# EAGLE board tubeboardv2 (EAGLE 9.4.2)
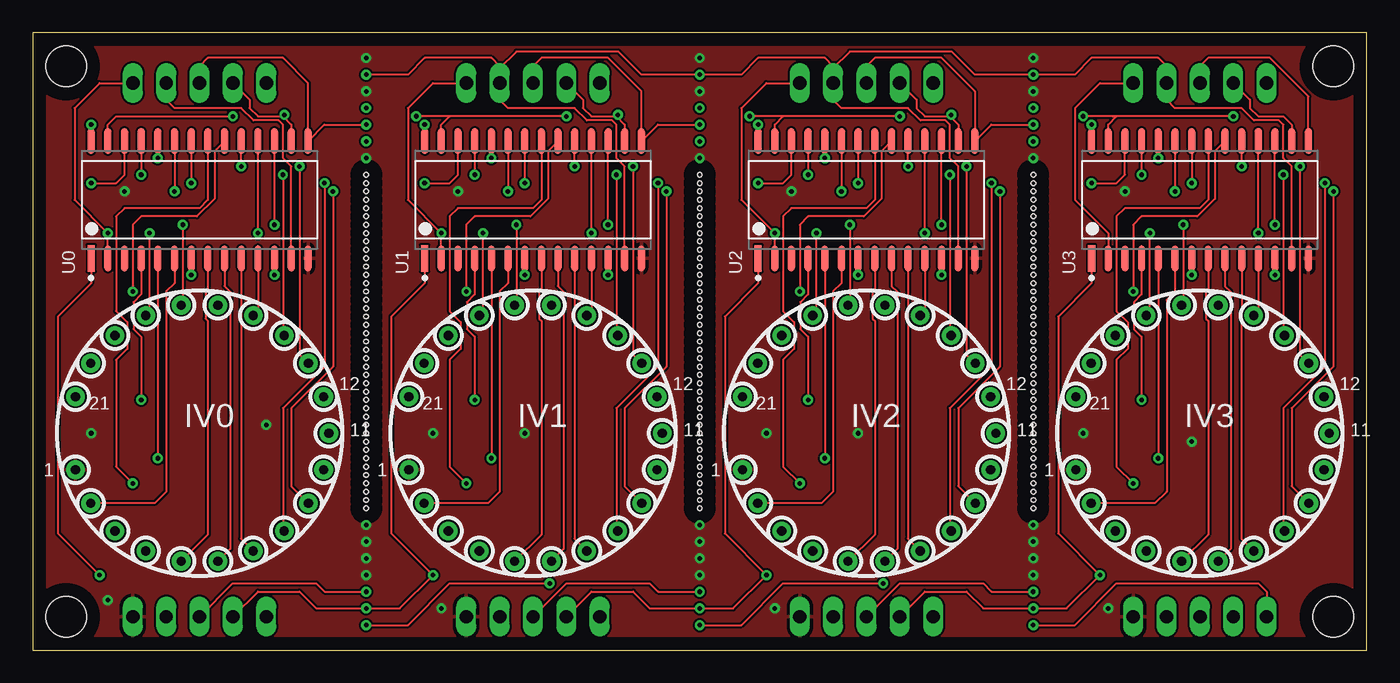
[diagram p0: board, top side]
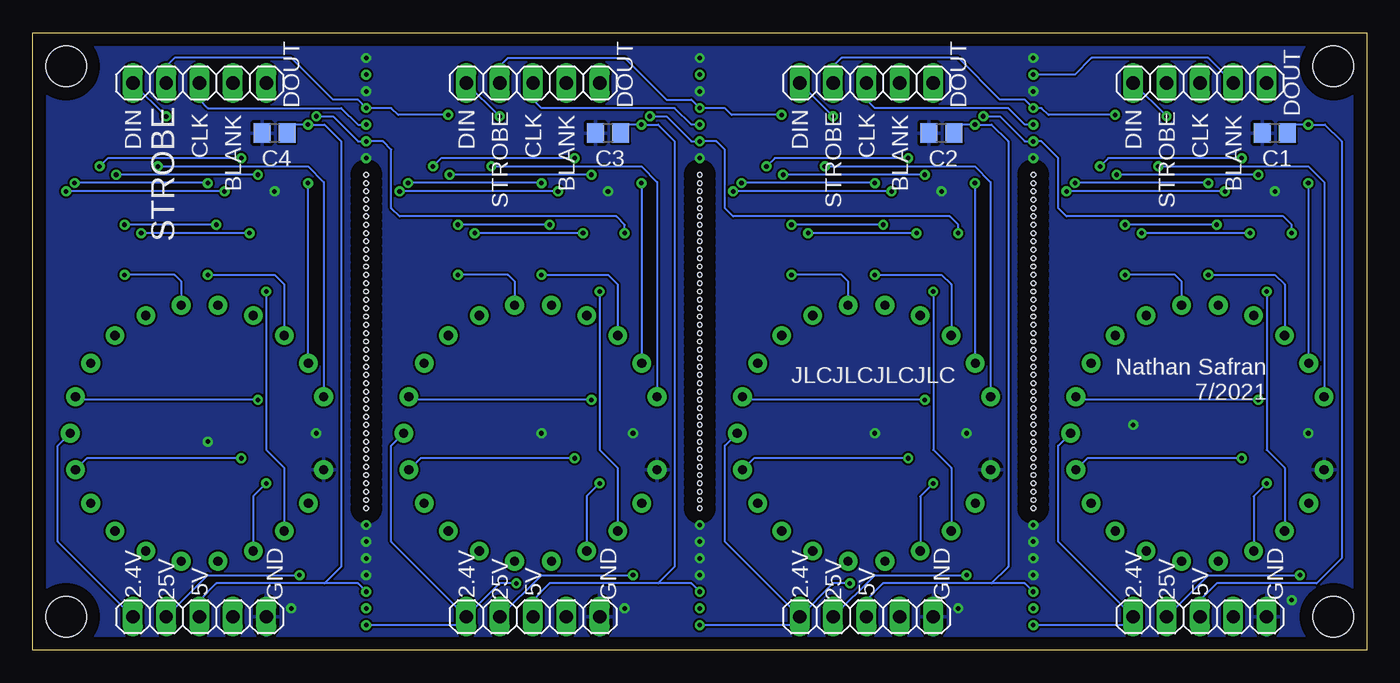
[diagram p1: board, bottom side, seen from below]

Size 101.6 x 47 mm. Coordinates in mm from the lower left corner, seen from the top.
Outline: 0,0 101.6,0 101.6,46.99 0,47 0,0
Copper layers (1*16): Top 0.035mm / dielectric 1.5mm / Bottom 0.035mm
Design rules "default": minimum track width 6mil, minimum drill 0.35mm, track to track 6mil, track to pad 6mil, pad to pad 6mil, via to via 6mil, smd to smd 6mil, copper to edge 40mil, drill to drill 6mil, minimum pad ring 10mil, minimum via ring 8mil, stop-mask expansion 4mil, vias tented up to drill 0mil, thermal gap 10mil
Holes 3.1 mm at 2.54,44.45 2.54,2.54 99.06,2.54 99.06,44.45
Holes 0.35 mm at 25.4,36.2 25.4,35.56 25.4,34.92 25.4,34.29 25.4,33.66 25.4,33.02 25.4,32.38 25.4,31.75 25.4,31.11 25.4,30.48 25.4,29.84 25.4,28.57 25.4,29.21 25.4,27.94 25.4,27.3 25.4,26.67 25.4,26.04 25.4,25.4 25.4,24.77 25.4,24.13 25.4,23.5 25.4,22.86 25.4,22.23 25.4,21.59 25.4,20.95 25.4,20.32 25.4,19.68 25.4,19.05 25.4,18.41 25.4,17.78 25.4,17.14 25.4,16.51 25.4,15.88 25.4,15.24 25.4,14.61 25.4,13.97 25.4,13.34 25.4,12.7 25.4,12.06 25.4,11.43 25.4,10.79 50.8,36.2 50.8,35.56 50.8,34.92 50.8,34.29 50.8,33.66 50.8,33.02 50.8,32.38 50.8,31.75 50.8,31.11 50.8,30.48 50.8,29.84 50.8,28.57 50.8,29.21 50.8,27.94 50.8,27.3 50.8,26.67 50.8,26.04 50.8,25.4 50.8,24.77 50.8,24.13 50.8,23.5 50.8,22.86 50.8,22.23 50.8,21.59 50.8,20.95 50.8,20.32 50.8,19.68 50.8,19.05 50.8,18.41 50.8,17.78 50.8,17.14 50.8,16.51 50.8,15.88 50.8,15.24 50.8,14.61 50.8,13.97 50.8,13.34 50.8,12.7 50.8,12.06 50.8,11.43 50.8,10.79 76.2,36.2 76.2,35.56 76.2,34.92 76.2,34.29 76.2,33.66 76.2,33.02 76.2,32.38 76.2,31.75 76.2,31.11 76.2,30.48 76.2,29.84 76.2,28.57 76.2,29.21 76.2,27.94 76.2,27.3 76.2,26.67 76.2,26.04 76.2,25.4 76.2,24.77 76.2,24.13 76.2,23.5 76.2,22.86 76.2,22.23 76.2,21.59 76.2,20.95 76.2,20.32 76.2,19.68 76.2,19.05 76.2,18.41 76.2,17.78 76.2,17.14 76.2,16.51 76.2,15.88 76.2,15.24 76.2,14.61 76.2,13.97 76.2,13.34 76.2,12.7 76.2,12.06 76.2,11.43 76.2,10.79

## Footprints (pad centres in the part's own frame; a part is rotated, then mirrored left to right if it is on the bottom)
C0805 = smd 1.3 x 1.5: 1 -0.95,0; 2 0.95,0
NIXIE-22 = drill 0.7 pad 1.422: 1 -9.451,-2.775; 2 -8.287,-5.325; 3 -6.45,-7.444; 4 -4.092,-8.96; 5 -1.402,-9.75; 6 1.402,-9.75; 7 4.092,-8.96; 8 6.45,-7.444; 9 8.287,-5.325; 10 9.451,-2.775; 11 9.85,0; 12 9.451,2.775; 13 8.287,5.325; 14 6.45,7.444; 15 4.092,8.96; 16 1.402,9.75; 17 -1.402,9.75; 18 -4.092,8.96; 19 -6.45,7.444; 20 -8.287,5.325; 21 -9.451,2.775
1X05 = drill 1.016 long: 1 -5.08,0; 2 -2.54,0; 3 0,0; 4 2.54,0; 5 5.08,0
MICROCHIP_HV5812WG-G_0 = smd 2.003 x 0.542: 1 -4.465,8.255; 2 -4.465,6.985; 3 -4.465,5.715; 4 -4.465,4.445; 5 -4.465,3.175; 6 -4.465,1.905; 7 -4.465,0.635; 8 -4.465,-0.635; 9 -4.465,-1.905; 10 -4.465,-3.175; 11 -4.465,-4.445; 12 -4.465,-5.715; 13 -4.465,-6.985; 14 -4.465,-8.255; 15 4.465,-8.255; 16 4.465,-6.985; 17 4.465,-5.715; 18 4.465,-4.445; 19 4.465,-3.175; 20 4.465,-1.905; 21 4.465,-0.635; 22 4.465,0.635; 23 4.465,1.905; 24 4.465,3.175; 25 4.465,4.445; 26 4.465,5.715; 27 4.465,6.985; 28 4.465,8.255

## Placement (x,y rotation side)
C1  [C0805]  6.99,39.37 180 bottom
C2  [C0805]  32.38,39.37 180 bottom
C3  [C0805]  57.78,39.37 180 bottom
C4  [C0805]  83.19,39.37 180 bottom
IV0  IV17  [NIXIE-22]  12.7,16.51 0 top
IV1  IV17  [NIXIE-22]  38.1,16.51 0 top
IV2  IV17  [NIXIE-22]  63.5,16.51 0 top
IV3  IV17  [NIXIE-22]  88.9,16.51 0 top
JP1  [1X05]  12.7,2.54 0 bottom
JP2  [1X05]  12.7,43.18 0 bottom
JP3  [1X05]  38.1,2.54 0 bottom
JP4  [1X05]  38.1,43.18 0 bottom
JP5  [1X05]  63.5,2.54 0 bottom
JP6  [1X05]  63.5,43.18 0 bottom
JP7  [1X05]  88.9,2.54 0 bottom
JP8  [1X05]  88.9,43.18 0 bottom
U0  MICROCHIP_HV5812WG-GMICROCHIP_HV5812WG-G_0_0  [MICROCHIP_HV5812WG-G_0]  12.7,34.29 90 top
U1  MICROCHIP_HV5812WG-GMICROCHIP_HV5812WG-G_0_0  [MICROCHIP_HV5812WG-G_0]  38.1,34.29 90 top
U2  MICROCHIP_HV5812WG-GMICROCHIP_HV5812WG-G_0_0  [MICROCHIP_HV5812WG-G_0]  63.5,34.29 90 top
U3  MICROCHIP_HV5812WG-GMICROCHIP_HV5812WG-G_0_0  [MICROCHIP_HV5812WG-G_0]  88.9,34.29 90 top

## Library data of the parts
C1-C4 = rcl; SPICEPREFIX: C
IV0 IV1-IV3 = XXXXXXtube supl
JP1-JP8 = pinhead
U0 U1-U3 = Microchip - HV5812WG-G; CENTROID_NOT_SPECIFIED: No; DATASHEET: http://www.mouser.com/ds/2/268/HV5812%20C072413-767325.pdf; DIGIKEY_DESCRIPTION: IC DISPLAY DVR 20CH 80V 28SOI; DIGIKEY_PART_NUMBER: HV5812WG-GCT-ND; IPC_LAND_PATTERN_NAME: SOIC127P1030X240-28; LEAD_FREE: yes; MF: Microchip; MOUSER_PART_NUMBER: 689-HV5812WG-G; MPN: HV5812WG-G; PACKAGE: SOIC28; PREFIX: U; ROHS: yes; TEMPERATURE_RANGE_HIGH: +125°C; TEMPERATURE_RANGE_LOW: -40°C

## Nets
+5V: C1.1 C2.1 C3.1 C4.1 JP1.3 JP3.3 JP5.3 JP7.3 U0.28 U1.28 U2.28 U3.28
BLANK: JP2.4 JP4.4 JP6.4 JP8.4 U0.13 U1.13 U2.13 U3.13
CLOCK: JP2.3 JP4.3 JP6.3 JP8.3 U0.15 U1.15 U2.15 U3.15
DATA_IN: JP2.1 U0.27
DATA_OUT0_TO_1: JP2.5 JP4.1 U0.2 U1.27
DATA_OUT1_TO_2: JP4.5 JP6.1 U1.2 U2.27
DATA_OUT2_TO_3: JP6.5 JP8.1 U2.2 U3.27
DATA_OUT3_TO_4: JP8.5 U3.2
GND: C1.2 C2.2 C3.2 C4.2 IV0.1 IV1.1 IV2.1 IV3.1 JP1.5 JP3.5 JP5.5 JP7.5 U0.14 U1.14 U2.14 U3.14
N$1: IV0.20 U0.26
N$2: IV0.14 U0.25
N$3: IV0.13 U0.24
N$4: IV0.9 U0.23
N$5: IV0.8 U0.22
N$6: IV0.4 U0.21
N$7: IV0.3 U0.20
N$8: IV0.21 U0.19
N$9: IV0.18 U0.18
N$10: IV0.17 U0.17
N$11: IV0.16 U0.12
N$12: IV0.15 U0.11
N$13: IV0.7 U0.10
N$14: IV0.6 U0.9
N$15: IV0.5 U0.8
N$16: IV0.19 U0.7
N$17: IV0.2 U0.6
N$18: IV0.10 U0.5
N$19: IV0.12 U0.4
N$20: IV1.20 U1.26
N$21: IV1.14 U1.25
N$22: IV1.13 U1.24
N$23: IV1.9 U1.23
N$24: IV1.8 U1.22
N$25: IV1.4 U1.21
N$26: IV1.3 U1.20
N$27: IV1.21 U1.19
N$28: IV1.18 U1.18
N$29: IV1.17 U1.17
N$30: IV1.16 U1.12
N$31: IV1.15 U1.11
N$32: IV1.7 U1.10
N$33: IV1.6 U1.9
N$34: IV1.5 U1.8
N$35: IV1.19 U1.7
N$36: IV1.2 U1.6
N$37: IV1.10 U1.5
N$38: IV1.12 U1.4
N$39: IV2.20 U2.26
N$40: IV2.14 U2.25
N$41: IV2.13 U2.24
N$42: IV2.9 U2.23
N$43: IV2.8 U2.22
N$44: IV2.4 U2.21
N$45: IV2.3 U2.20
N$46: IV2.21 U2.19
N$47: IV2.18 U2.18
N$48: IV2.17 U2.17
N$49: IV2.16 U2.12
N$50: IV2.15 U2.11
N$51: IV2.7 U2.10
N$52: IV2.6 U2.9
N$53: IV2.5 U2.8
N$54: IV2.19 U2.7
N$55: IV2.2 U2.6
N$56: IV2.10 U2.5
N$57: IV2.12 U2.4
N$58: IV3.20 U3.26
N$59: IV3.14 U3.25
N$60: IV3.13 U3.24
N$61: IV3.9 U3.23
N$62: IV3.8 U3.22
N$63: IV3.4 U3.21
N$64: IV3.3 U3.20
N$65: IV3.21 U3.19
N$66: IV3.18 U3.18
N$67: IV3.17 U3.17
N$68: IV3.16 U3.12
N$69: IV3.15 U3.11
N$70: IV3.7 U3.10
N$71: IV3.6 U3.9
N$72: IV3.5 U3.8
N$73: IV3.19 U3.7
N$74: IV3.2 U3.6
N$75: IV3.10 U3.5
N$76: IV3.12 U3.4
STROBE: JP2.2 JP4.2 JP6.2 JP8.2 U0.16 U1.16 U2.16 U3.16
VEE: IV0.11 IV1.11 IV2.11 IV3.11 JP1.1 JP3.1 JP5.1 JP7.1
VPP: JP1.2 JP3.2 JP5.2 JP7.2 U0.1 U1.1 U2.1 U3.1

## Tracks (layer width: path | path; a pad name or v marks a point on that pad's centre or on a via)
+5V  (via drill 0.35)
  Top 0.152: U0.28 v4.45,40.01 | U1.28 v29.84,40.01 | U2.28 v55.24,40.01 | U3.28 v80.64,40.01 | JP1.3 15.24,5.08 21.59,5.08 22.23,4.45 v25.4,4.45 | JP3.3 40.64,5.08 46.99,5.08 47.62,4.45 v50.8,4.45 | JP5.3 66.04,5.08 72.39,5.08 73.03,4.45 v76.2,4.45
  Bottom 0.152: C1.1 5.4,40.01 v4.45,40.01 3.17,40.01 1.91,38.73 1.91,6.99 3.81,5.08 11.43,5.08 12.7,3.81 JP1.3 | C2.1 30.8,40.01 v29.84,40.01 28.57,40.01 27.3,38.73 27.3,6.35 28.57,5.08 | 28.57,5.08 36.83,5.08 38.1,3.81 JP3.3 | C3.1 56.2,40.01 v55.24,40.01 53.98,40.01 52.7,38.73 52.7,6.35 53.98,5.08 | 53.98,5.08 62.23,5.08 63.5,3.81 JP5.3 | C4.1 81.6,40.01 v80.64,40.01 79.38,40.01 78.11,38.73 78.11,6.35 79.38,5.08 | 79.38,5.08 87.63,5.08 88.9,3.81 JP7.3 | v25.4,4.45 26.04,5.08 28.57,5.08 | v50.8,4.45 51.44,5.08 53.98,5.08 | v76.2,4.45 76.83,5.08 79.38,5.08
BLANK  (via drill 0.35)
  Top 0.152: U3.13 95.89,36.83 95.25,37.47 95.25,40.01 94.92,40.34 93.02,40.34 92.08,41.27 87,41.27 86.36,41.91 JP8.4 86.36,44.45 85.72,45.09 80.64,45.09 79.38,43.81 v76.2,43.81 71.75,43.81 70,45.57 62.23,45.57 60.96,44.3 | U2.13 70.48,36.83 69.85,37.47 69.85,40.01 69.52,40.34 67.61,40.34 66.67,41.27 61.59,41.27 60.96,41.91 JP6.4 60.96,44.3 | U1.13 45.09,36.83 44.45,37.47 44.45,40.01 44.12,40.34 42.22,40.34 41.27,41.27 36.2,41.27 35.56,41.91 JP4.4 | U0.13 19.68,36.83 19.05,37.47 19.05,40.01 18.72,40.34 16.82,40.34 15.88,41.27 10.79,41.27 10.16,41.91 JP2.4 | JP4.4 35.56,44.45 34.92,45.09 29.84,45.09 28.57,43.81 v25.4,43.81 | 60.96,44.3 60.96,44.45 60.33,45.09 55.24,45.09 53.98,43.81 v50.8,43.81 46.35,43.81 44.6,45.57 36.83,45.57 35.56,44.3 JP4.4
  Bottom 0.152: JP2.4 12.06,45.09 20.95,45.09 22.23,43.81 v25.4,43.81
CLOCK  (via drill 0.35)
  Top 0.152: JP2.3 12.7,44.45 13.34,45.09 19.05,45.09 20.95,43.18 U0.15 22.2,40.01 v25.4,40.01 | JP4.3 38.1,44.45 38.73,45.09 43.81,45.09 46.35,42.55 U1.15 47.6,40.01 v50.8,40.01 | JP6.3 63.5,44.45 64.14,45.09 69.22,45.09 71.75,42.55 U2.15 73,40.01 v76.2,40.01 | JP8.3 88.9,44.45 89.53,45.09 94.24,45.09 97.16,42.17 U3.15
  Bottom 0.152: v25.4,40.01 26.04,40.01 27.3,41.27 37.47,41.27 38.1,41.91 JP4.3 | v50.8,40.01 51.44,40.01 52.7,41.27 62.87,41.27 63.5,41.91 JP6.3 | JP8.3 88.9,41.91 88.27,41.27 78.11,41.27 76.83,40.01 v76.2,40.01
DATA_IN  (via drill 0.35)
  Top 0.152: U0.27 5.71,40.01 6.35,40.64 v15.24,40.64
  Bottom 0.152: v15.24,40.64 JP2.1
DATA_OUT0_TO_1  (via drill 0.35)
  Top 0.152: U0.2 v5.71,31.75 3.17,34.29 3.17,41.27 5.08,43.18 JP2.5 | U1.27 31.11,40.01 31.75,40.64 | v40.64,40.64 31.75,40.64 | v29.2,40.65 v29.21,40.64 31.75,40.64
  Bottom 0.152: v40.64,40.64 JP4.1 | v5.71,31.75 5.71,32.38 6.35,33.02 22.86,33.02 23.5,33.66 23.5,37.47 24.77,38.73 v25.4,38.73 26.04,38.73 27.94,40.64 v29.2,40.64 v29.2,40.65
DATA_OUT1_TO_2  (via drill 0.35)
  Top 0.152: U1.2 v31.11,31.75 28.57,34.29 28.57,41.27 30.48,43.18 JP4.5 | U2.27 56.52,40.01 57.15,40.64 | v66.04,40.64 57.15,40.64 | 57.15,40.64 57.14,40.65 | 57.15,40.64 v54.61,40.64 v54.6,40.65
  Bottom 0.152: v66.04,40.64 JP6.1 | v31.11,31.75 31.11,32.38 31.75,33.02 48.26,33.02 48.9,33.66 48.9,38.1 49.53,38.73 v50.8,38.73 51.44,38.73 53.34,40.64 v54.59,40.64 v54.6,40.65
DATA_OUT2_TO_3  (via drill 0.35)
  Top 0.152: U2.2 v56.52,31.75 53.98,34.29 53.98,41.27 55.88,43.18 JP6.5 | U3.27 81.92,40.01 82.55,40.64 | v91.44,40.64 82.55,40.64 | 82.24,40.64 82.55,40.64 | 82.55,40.64 82.54,40.65 v80,40.65
  Bottom 0.152: v91.44,40.64 JP8.1 | v56.52,31.75 56.52,32.38 57.15,33.02 73.66,33.02 74.3,33.66 74.3,38.1 74.93,38.73 v76.2,38.73 76.83,38.73 78.74,40.64 v80,40.64 v80,40.65
DATA_OUT3_TO_4
  Top 0.152: U3.2 81.92,31.75 79.38,34.29 79.38,41.27 81.28,43.18 JP8.5
GND  (via drill 0.35)
  other vias: 4.45,16.51 17.78,17.14 5.71,3.81 31.11,3.17 37.47,16.51 30.48,16.51 62.87,16.51 55.88,16.51 56.52,3.17 81.92,3.17 88.27,15.88 80.01,16.51 50.8,6.99 50.8,8.26 50.8,9.53 50.8,37.47 50.8,45.09 25.4,45.09 25.4,42.55 50.8,42.55 76.2,42.55 76.2,45.09 76.2,37.47 76.2,9.53 76.2,8.26 76.2,6.99 76.2,5.71 50.8,5.71 25.4,5.71 25.4,6.99 25.4,8.26 25.4,9.53 25.4,37.47 57.78,34.92 83.19,34.92 32.38,34.92 6.99,34.92
  pour Top: 0,46.99 101.6,46.99 101.6,0 0,0
  pour Bottom: 0,46.99 101.6,46.99 101.6,0 0,0
N$1  (via drill 0.35)
  Top 0.152: v4.45,35.56 6.35,35.56 6.99,36.2 U0.26
  Bottom 0.152: IV0.20 4.41,35.53 v4.45,35.56
N$2  (via drill 0.35)
  Top 0.152: U0.25 v8.26,36.2 | IV0.14 19.05,24.05 v19.05,36.2
  Bottom 0.152: v8.26,36.2 v19.05,36.2
N$3  (via drill 0.35)
  Top 0.152: IV0.13 20.32,22.5 v20.32,36.83 | v9.53,37.47 U0.24
  Bottom 0.152: v9.53,37.47 19.68,37.47 v20.32,36.83
N$4  (via drill 0.35)
  Top 0.152: U0.23 v10.79,34.92 | v22.86,34.92 22.86,21.59 19.68,18.41 19.68,12.49 IV0.9
  Bottom 0.152: v10.79,34.92 v22.86,34.92
N$5  (via drill 0.35)
  Top 0.152: U0.22 v12.06,35.56 | v22.22,35.57 22.22,21.58 19.05,18.41 19.05,9.17 IV0.8
  Bottom 0.152: v12.06,35.56 12.07,35.57 v22.22,35.57
N$6  (via drill 0.35)
  Top 0.152: U0.21 13.34,34.29 12.7,33.66 6.99,33.66 6.35,33.02 6.35,25.82 7.19,24.98 7.19,22.93 6.35,22.09 6.35,13.97 v7.62,12.7
  Bottom 0.152: v7.62,12.7 8.61,11.71 IV0.4
N$7  (via drill 0.35)
  Top 0.152: U0.20 13.84,37.98 13.84,34.36 12.5,33.02 8.26,33.02 7.62,32.38 v7.62,27.3
  Bottom 0.152: v7.62,27.3 7.62,15.24 6.25,13.87 IV0.3
N$8  (via drill 0.35)
  Top 0.152: v15.88,36.83 U0.19
  Bottom 0.152: v15.88,36.83 4.45,36.83 3.25,35.63 IV0.21
N$9  (via drill 0.35)
  Top 0.152: IV0.18 8.89,25.75 v8.89,31.75 | v17.14,31.75 U0.18
  Bottom 0.152: v8.89,31.75 v17.14,31.75
N$10  (via drill 0.35)
  Top 0.152: v18.41,32.38 U0.17 | v11.43,32.38 11.43,26.39 IV0.17
  Bottom 0.152: v11.43,32.38 v18.41,32.38
N$11  (via drill 0.35)
  Top 0.152: v18.41,28.57 U0.12
  Bottom 0.152: v18.41,28.57 14.61,28.57 14.1,28.07 IV0.16
N$12
  Top 0.152: U0.11 17.14,25.82 IV0.15
N$13
  Top 0.152: U0.10 15.88,25.88 15.85,25.86 15.85,8.49 IV0.7
N$14
  Top 0.152: U0.9 14.61,27.72 15.04,27.28 15.04,7.7 IV0.6
N$15
  Top 0.152: IV0.5 13.34,8.8 13.34,25.06 13.16,25.24 13.16,27.28 13.34,27.46 U0.8
N$16  (via drill 0.35)
  Top 0.152: U0.7 v12.06,28.57
  Bottom 0.152: v12.06,28.57 6.99,28.57 6.25,27.84 IV0.19
N$17
  Top 0.152: U0.6 10.79,27.94 10.16,27.3 10.16,12.06 9.28,11.18 IV0.2
N$18  (via drill 0.35)
  Top 0.152: U0.5 9.53,25.88 9.55,25.86 9.55,25.08 9.53,25.06 v9.53,14.61
  Bottom 0.152: v9.53,14.61 21.28,14.61 IV0.10
N$19  (via drill 0.35)
  Top 0.152: U0.4 8.26,27.08 7.67,26.49 7.67,24.45 8.26,23.86 v8.26,19.05
  Bottom 0.152: v8.26,19.05 21.92,19.05 IV0.12
N$20  (via drill 0.35)
  Top 0.152: v29.84,35.56 31.75,35.56 32.38,36.2 U1.26
  Bottom 0.152: IV1.20 29.81,35.53 v29.84,35.56
N$21  (via drill 0.35)
  Top 0.152: U1.25 v33.66,36.2 | IV1.14 44.45,24.05 v44.45,36.2
  Bottom 0.152: v33.66,36.2 v44.45,36.2
N$22  (via drill 0.35)
  Top 0.152: IV1.13 45.72,22.5 v45.72,36.83 | v34.92,37.47 U1.24
  Bottom 0.152: v34.92,37.47 45.09,37.47 v45.72,36.83
N$23  (via drill 0.35)
  Top 0.152: U1.23 v36.2,34.92 | v48.26,34.92 48.26,21.59 45.09,18.41 45.09,12.49 IV1.9
  Bottom 0.152: v36.2,34.92 v48.26,34.92
N$24  (via drill 0.35)
  Top 0.152: U1.22 v37.47,35.56 | v47.62,35.57 47.62,21.58 44.45,18.41 44.45,9.17 IV1.8
  Bottom 0.152: v37.47,35.56 v37.47,35.57 v47.62,35.57
N$25  (via drill 0.35)
  Top 0.152: U1.21 38.73,34.29 38.1,33.66 32.38,33.66 31.75,33.02 31.75,25.82 32.59,24.98 32.59,22.93 31.75,22.09 31.75,13.97 v33.02,12.7
  Bottom 0.152: v33.02,12.7 34.01,11.71 IV1.4
N$26  (via drill 0.35)
  Top 0.152: U1.20 39.23,37.98 39.23,34.36 37.9,33.02 33.66,33.02 33.02,32.38 v33.02,27.3
  Bottom 0.152: v33.02,27.3 33.02,15.24 31.65,13.87 IV1.3
N$27  (via drill 0.35)
  Top 0.152: v41.27,36.83 U1.19
  Bottom 0.152: v41.27,36.83 29.84,36.83 28.65,35.63 IV1.21
N$28  (via drill 0.35)
  Top 0.152: IV1.18 34.29,25.75 v34.29,31.75 | v42.55,31.75 U1.18
  Bottom 0.152: v34.29,31.75 v42.55,31.75
N$29  (via drill 0.35)
  Top 0.152: v43.81,32.38 U1.17 | v36.83,32.38 36.83,26.39 IV1.17
  Bottom 0.152: v36.83,32.38 v43.81,32.38
N$30  (via drill 0.35)
  Top 0.152: v43.81,28.57 U1.12
  Bottom 0.152: v43.81,28.57 40.01,28.57 39.5,28.07 IV1.16
N$31
  Top 0.152: U1.11 42.55,25.82 IV1.15
N$32
  Top 0.152: U1.10 41.27,25.88 41.25,25.86 41.25,8.49 IV1.7
N$33
  Top 0.152: U1.9 40.01,27.72 40.44,27.28 40.44,7.7 IV1.6
N$34
  Top 0.152: IV1.5 38.73,8.8 38.73,25.06 38.56,25.24 38.56,27.28 38.73,27.46 U1.8
N$35  (via drill 0.35)
  Top 0.152: U1.7 v37.47,28.57
  Bottom 0.152: v37.47,28.57 32.38,28.57 31.65,27.84 IV1.19
N$36
  Top 0.152: U1.6 36.2,27.94 35.56,27.3 35.56,12.06 34.68,11.18 IV1.2
N$37  (via drill 0.35)
  Top 0.152: U1.5 34.92,25.88 34.95,25.86 34.95,25.08 34.92,25.06 v34.92,14.61
  Bottom 0.152: v34.92,14.61 46.68,14.61 IV1.10
N$38  (via drill 0.35)
  Top 0.152: U1.4 33.66,27.08 33.07,26.49 33.07,24.45 33.66,23.86 v33.66,19.05
  Bottom 0.152: v33.66,19.05 47.32,19.05 IV1.12
N$39  (via drill 0.35)
  Top 0.152: v55.24,35.56 57.15,35.56 57.78,36.2 U2.26
  Bottom 0.152: IV2.20 55.21,35.53 v55.24,35.56
N$40  (via drill 0.35)
  Top 0.152: U2.25 v59.05,36.2 | IV2.14 69.85,24.05 v69.85,36.2
  Bottom 0.152: v59.05,36.2 v69.85,36.2
N$41  (via drill 0.35)
  Top 0.152: IV2.13 71.12,22.5 v71.12,36.83 | v60.33,37.47 U2.24
  Bottom 0.152: v60.33,37.47 70.48,37.47 v71.12,36.83
N$42  (via drill 0.35)
  Top 0.152: U2.23 v61.59,34.92 | v73.66,34.92 73.66,21.59 70.48,18.41 70.48,12.49 IV2.9
  Bottom 0.152: v61.59,34.92 v73.66,34.92
N$43  (via drill 0.35)
  Top 0.152: U2.22 v62.87,35.56 | v73.02,35.57 73.02,21.58 69.85,18.41 69.85,9.17 IV2.8
  Bottom 0.152: v62.87,35.56 v62.87,35.57 v73.02,35.57
N$44  (via drill 0.35)
  Top 0.152: U2.21 64.14,34.29 63.5,33.66 57.78,33.66 57.15,33.02 57.15,25.82 57.99,24.98 57.99,22.93 57.15,22.09 57.15,13.97 v58.42,12.7
  Bottom 0.152: v58.42,12.7 59.41,11.71 IV2.4
N$45  (via drill 0.35)
  Top 0.152: U2.20 64.64,37.98 64.64,34.36 63.3,33.02 59.05,33.02 58.42,32.38 v58.42,27.3
  Bottom 0.152: v58.42,27.3 58.42,15.24 57.05,13.87 IV2.3
N$46  (via drill 0.35)
  Top 0.152: v66.67,36.83 U2.19
  Bottom 0.152: v66.67,36.83 55.24,36.83 54.05,35.63 IV2.21
N$47  (via drill 0.35)
  Top 0.152: IV2.18 59.69,25.75 v59.69,31.75 | v67.94,31.75 U2.18
  Bottom 0.152: v59.69,31.75 v67.94,31.75
N$48  (via drill 0.35)
  Top 0.152: v69.22,32.38 U2.17 | v62.23,32.38 62.23,26.39 IV2.17
  Bottom 0.152: v62.23,32.38 v69.22,32.38
N$49  (via drill 0.35)
  Top 0.152: v69.22,28.57 U2.12
  Bottom 0.152: v69.22,28.57 65.41,28.57 64.9,28.07 IV2.16
N$50
  Top 0.152: U2.11 67.94,25.82 IV2.15
N$51
  Top 0.152: U2.10 66.67,25.88 66.65,25.86 66.65,8.49 IV2.7
N$52
  Top 0.152: U2.9 65.41,27.72 65.84,27.28 65.84,7.7 IV2.6
N$53
  Top 0.152: IV2.5 64.14,8.8 64.14,25.06 63.96,25.24 63.96,27.28 64.14,27.46 U2.8
N$54  (via drill 0.35)
  Top 0.152: U2.7 v62.87,28.57
  Bottom 0.152: v62.87,28.57 57.78,28.57 57.05,27.84 IV2.19
N$55
  Top 0.152: U2.6 61.59,27.94 60.96,27.3 60.96,12.06 60.08,11.18 IV2.2
N$56  (via drill 0.35)
  Top 0.152: U2.5 60.33,25.88 60.35,25.86 60.35,25.08 60.33,25.06 v60.33,14.61
  Bottom 0.152: v60.33,14.61 72.08,14.61 IV2.10
N$57  (via drill 0.35)
  Top 0.152: U2.4 59.05,27.08 58.47,26.49 58.47,24.45 59.05,23.86 v59.05,19.05
  Bottom 0.152: v59.05,19.05 72.72,19.05 IV2.12
N$58  (via drill 0.35)
  Top 0.152: v80.64,35.56 82.55,35.56 83.19,36.2 U3.26
  Bottom 0.152: IV3.20 80.61,35.53 v80.64,35.56
N$59  (via drill 0.35)
  Top 0.152: U3.25 v84.45,36.2 | IV3.14 95.25,24.05 v95.25,36.2
  Bottom 0.152: v84.45,36.2 v95.25,36.2
N$60  (via drill 0.35)
  Top 0.152: IV3.13 96.52,22.5 v96.52,36.83 | v85.72,37.47 U3.24
  Bottom 0.152: v85.72,37.47 95.89,37.47 v96.52,36.83
N$61  (via drill 0.35)
  Top 0.152: U3.23 v87,34.92 | v99.06,34.92 99.06,21.59 95.89,18.41 95.89,12.49 IV3.9
  Bottom 0.152: v87,34.92 v99.06,34.92
N$62  (via drill 0.35)
  Top 0.152: U3.22 v88.27,35.56 | v98.42,35.57 98.42,21.58 95.25,18.41 95.25,9.17 IV3.8
  Bottom 0.152: v88.27,35.56 v88.27,35.57 v98.42,35.57
N$63  (via drill 0.35)
  Top 0.152: U3.21 89.53,34.29 88.9,33.66 83.19,33.66 82.55,33.02 82.55,25.82 83.39,24.98 83.39,22.93 82.55,22.09 82.55,13.97 v83.82,12.7
  Bottom 0.152: v83.82,12.7 84.81,11.71 IV3.4
N$64  (via drill 0.35)
  Top 0.152: U3.20 90.03,37.98 90.03,34.36 88.7,33.02 84.45,33.02 83.82,32.38 v83.82,27.3
  Bottom 0.152: v83.82,27.3 83.82,15.24 82.45,13.87 IV3.3
N$65  (via drill 0.35)
  Top 0.152: v92.08,36.83 U3.19
  Bottom 0.152: v92.08,36.83 80.64,36.83 79.45,35.63 IV3.21
N$66  (via drill 0.35)
  Top 0.152: IV3.18 85.09,25.75 v85.09,31.75 | v93.34,31.75 U3.18
  Bottom 0.152: v85.09,31.75 v93.34,31.75
N$67  (via drill 0.35)
  Top 0.152: v94.61,32.38 U3.17 | v87.63,32.38 87.63,26.39 IV3.17
  Bottom 0.152: v87.63,32.38 v94.61,32.38
N$68  (via drill 0.35)
  Top 0.152: v94.61,28.57 U3.12
  Bottom 0.152: v94.61,28.57 90.81,28.57 90.3,28.07 IV3.16
N$69
  Top 0.152: U3.11 93.34,25.82 IV3.15
N$70
  Top 0.152: U3.10 92.08,25.88 92.05,25.86 92.05,8.49 IV3.7
N$71
  Top 0.152: U3.9 90.81,27.72 91.24,27.28 91.24,7.7 IV3.6
N$72
  Top 0.152: IV3.5 89.53,8.8 89.53,25.06 89.36,25.24 89.36,27.28 89.53,27.46 U3.8
N$73  (via drill 0.35)
  Top 0.152: U3.7 v88.27,28.57
  Bottom 0.152: v88.27,28.57 83.19,28.57 82.45,27.84 IV3.19
N$74
  Top 0.152: U3.6 87,27.3 86.36,26.67 86.36,12.06 85.48,11.18 IV3.2
N$75  (via drill 0.35)
  Top 0.152: U3.5 85.72,25.88 85.75,25.86 85.75,25.08 85.72,25.06 v85.72,14.61
  Bottom 0.152: v85.72,14.61 97.48,14.61 IV3.10
N$76  (via drill 0.35)
  Top 0.152: U3.4 84.45,27.08 83.87,26.49 83.87,24.45 84.45,23.86 v84.45,19.05
  Bottom 0.152: v84.45,19.05 98.12,19.05 IV3.12
STROBE  (via drill 0.35)
  Top 0.152: JP2.2 16.51,41.91 16.51,41.27 17.14,40.64 19.05,40.64 | 19.05,40.64 19.68,40.01 U0.16 | JP4.2 41.91,41.91 41.91,41.27 42.55,40.64 44.45,40.64 | 44.45,40.64 45.09,40.01 U1.16 | JP6.2 67.31,41.91 67.31,41.27 67.94,40.64 69.85,40.64 | 69.85,40.64 70.48,40.01 U2.16 | JP8.2 92.71,41.91 92.71,41.27 93.34,40.64 95.25,40.64 95.89,40.01 U3.16 | 19.05,40.64 v19.16,40.75 | 44.45,40.64 v44.56,40.75 | 69.85,40.64 v69.96,40.75
  Bottom 0.152: v19.16,40.75 24.24,40.75 24.77,41.27 v25.4,41.27 26.04,41.91 27.94,41.91 31.11,45.09 40.01,45.09 40.64,44.45 JP4.2 | JP6.2 66.04,44.45 65.41,45.09 56.52,45.09 53.34,41.91 51.44,41.91 v50.8,41.27 48.9,41.27 48.37,40.75 v44.56,40.75 | v69.96,40.75 73.77,40.75 74.3,41.27 v76.2,41.27 76.83,41.91 78.74,41.91 81.92,45.09 90.81,45.09 91.44,44.45 JP8.2
VEE  (via drill 0.35)
  Top 0.152: v25.4,1.91 28.57,1.91 31.75,5.08 v39.37,5.08 | v50.8,1.91 53.98,1.91 57.15,5.08 v64.77,5.08 | v76.2,1.91 79.38,1.91 82.55,5.08 93.34,5.08 93.98,4.45 JP7.1
  Bottom 0.152: IV0.11 23.5,15.56 23.5,8.26 JP1.1 18.41,1.91 v25.4,1.91 | IV1.11 48.9,15.56 48.9,8.26 JP3.1 | IV2.11 74.3,15.56 74.3,8.26 JP5.1 | IV3.11 99.69,15.56 99.69,8.26 JP7.1 | JP3.1 43.81,1.91 v50.8,1.91 | 43.18,2.59 JP3.1 | v39.37,5.08 40.64,5.08 JP3.1 | JP5.1 69.22,1.91 v76.2,1.91 | v64.77,5.08 66.04,5.08 JP5.1
VPP  (via drill 0.35)
  Top 0.152: v5.08,5.71 1.91,8.89 1.91,25.4 4.45,27.94 U0.1 | U1.1 29.84,27.94 27.3,25.4 27.3,8.89 v30.48,5.71 27.94,3.17 v25.4,3.17 21.59,3.17 20.32,4.45 17.14,4.45 JP1.2 | U2.1 55.24,27.94 52.7,25.4 52.7,8.89 v55.88,5.71 53.34,3.17 v50.8,3.17 46.99,3.17 45.72,4.45 42.55,4.45 JP3.2 | U3.1 80.64,27.94 78.11,25.4 78.11,8.89 v81.28,5.71 78.74,3.17 v76.2,3.17 72.39,3.17 71.12,4.45 67.94,4.45 JP5.2
  Bottom 0.152: JP1.2 12.06,5.71 v5.08,5.71 | JP3.2 37.47,5.71 v30.48,5.71 | JP5.2 62.87,5.71 v55.88,5.71 | JP7.2 88.27,5.71 v81.28,5.71

## Text on the board
bNames: DOUT | DOUT | DOUT | DOUT | DIN | DIN | DIN | DIN | CLK | CLK | CLK | CLK | BLANK | BLANK | BLANK | BLANK | STROBE | STROBE | STROBE | STROBE | Nathan Safran / 7/2021 | JLCJLCJLCJLC | 2.4V | 2.4V | 2.4V | 2.4V | GND | 5V | 25V | GND | 5V | 25V | GND | 5V | 25V | GND | 5V | 25V